# EAGLE board Zeus v1 (EAGLE 7.4.0)
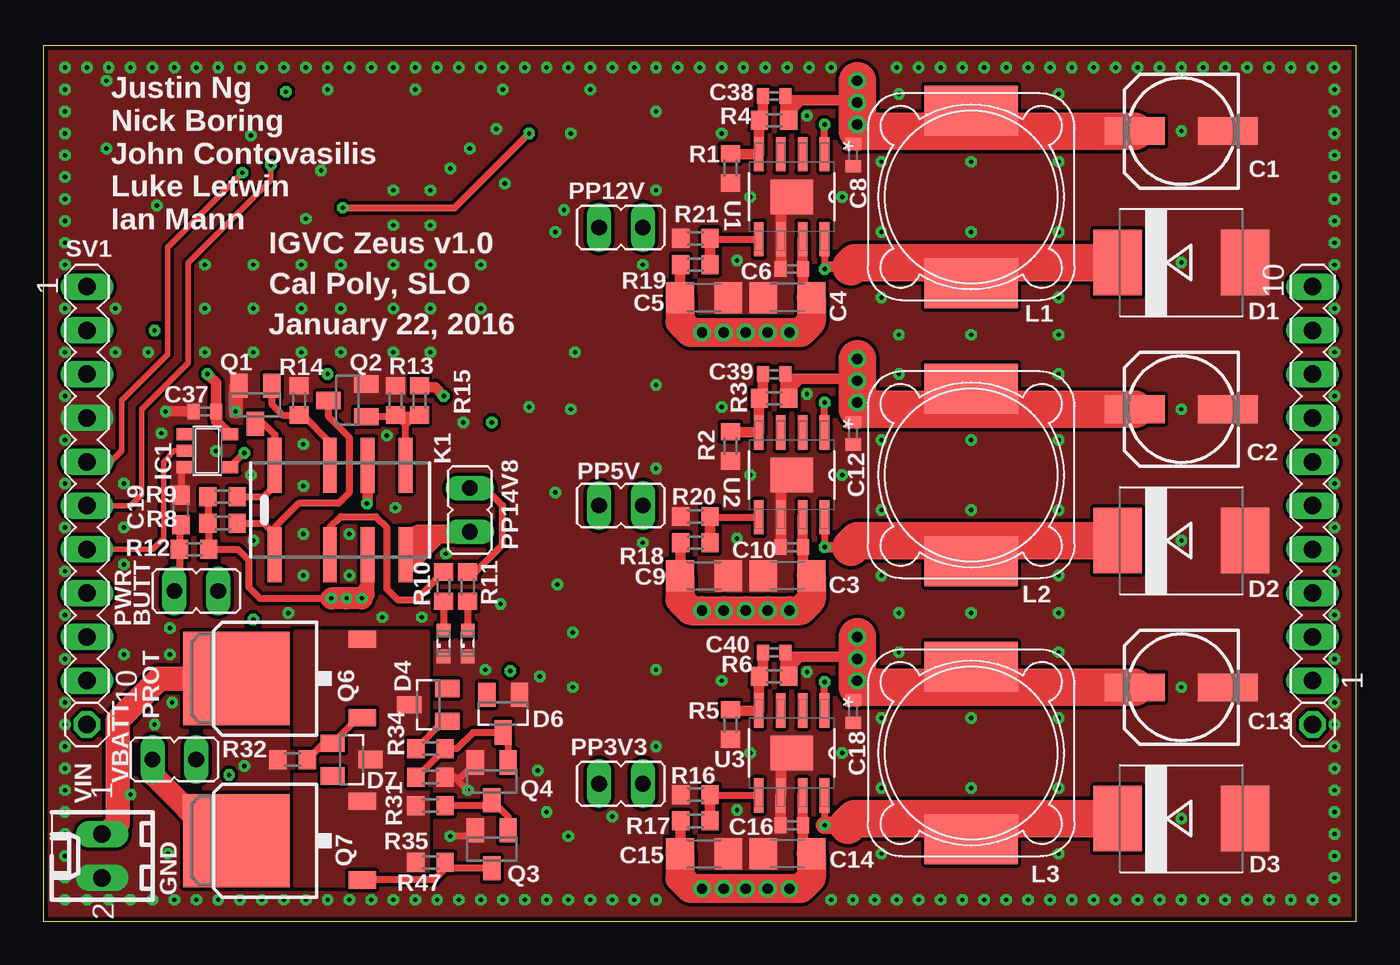
[diagram p0: board, top side]
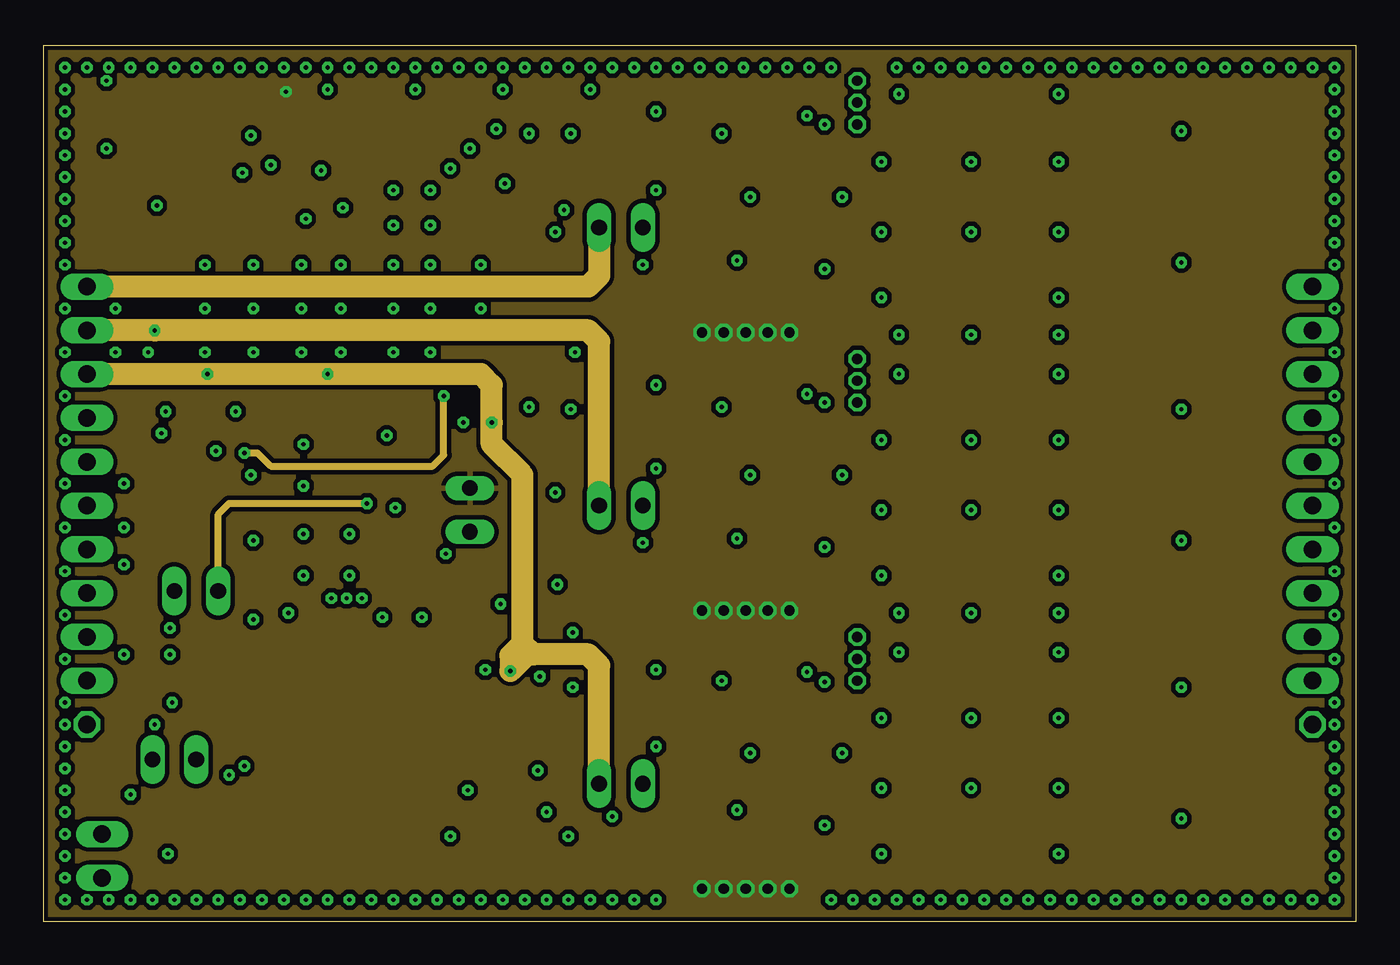
[diagram p1: board, inner layer Route2]
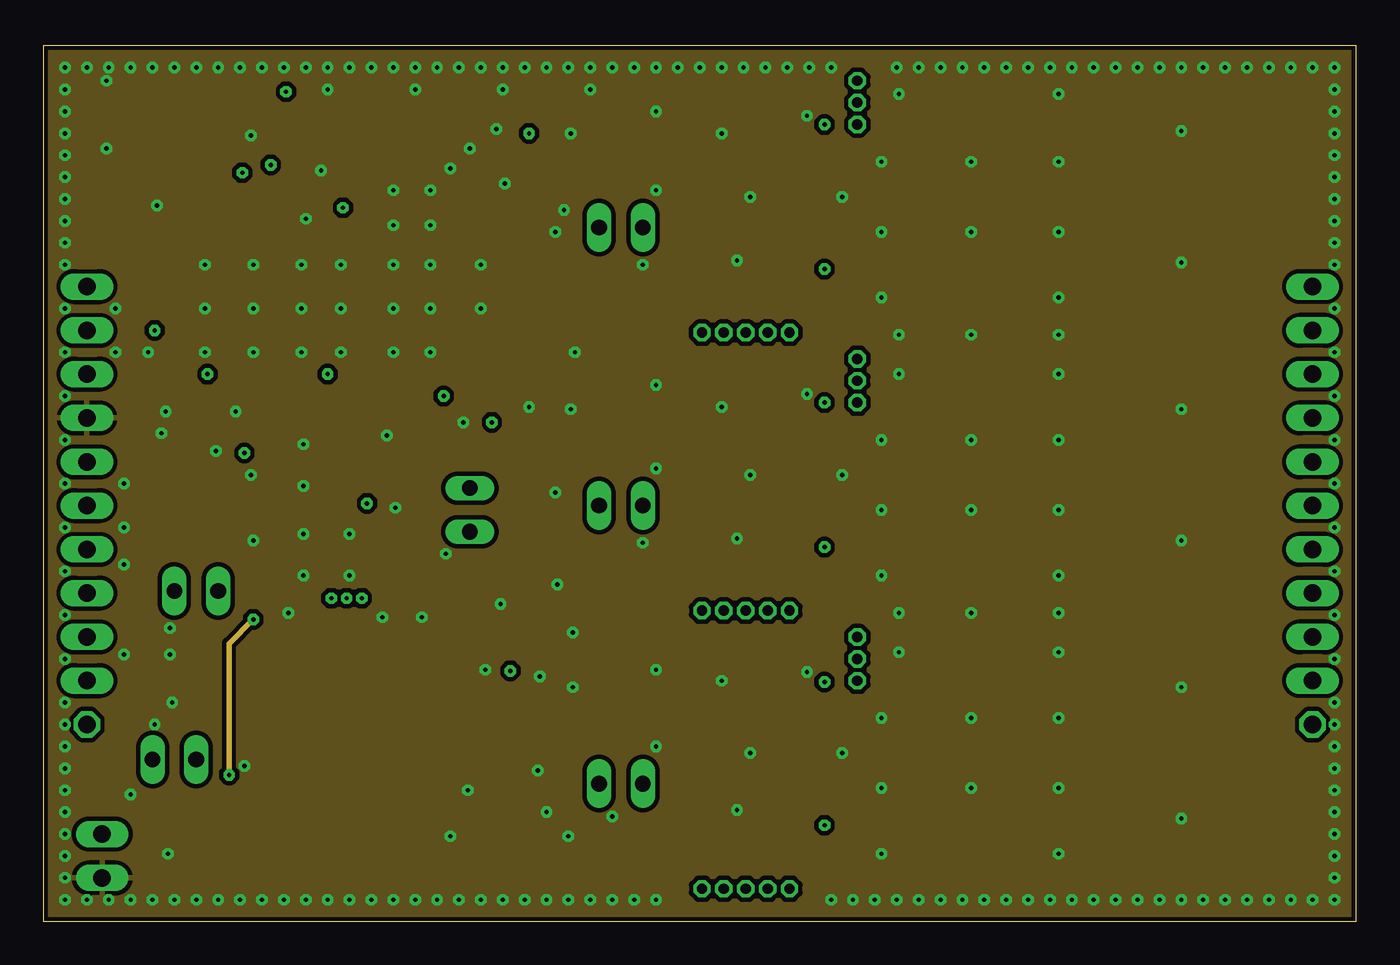
[diagram p2: board, inner layer Route15]
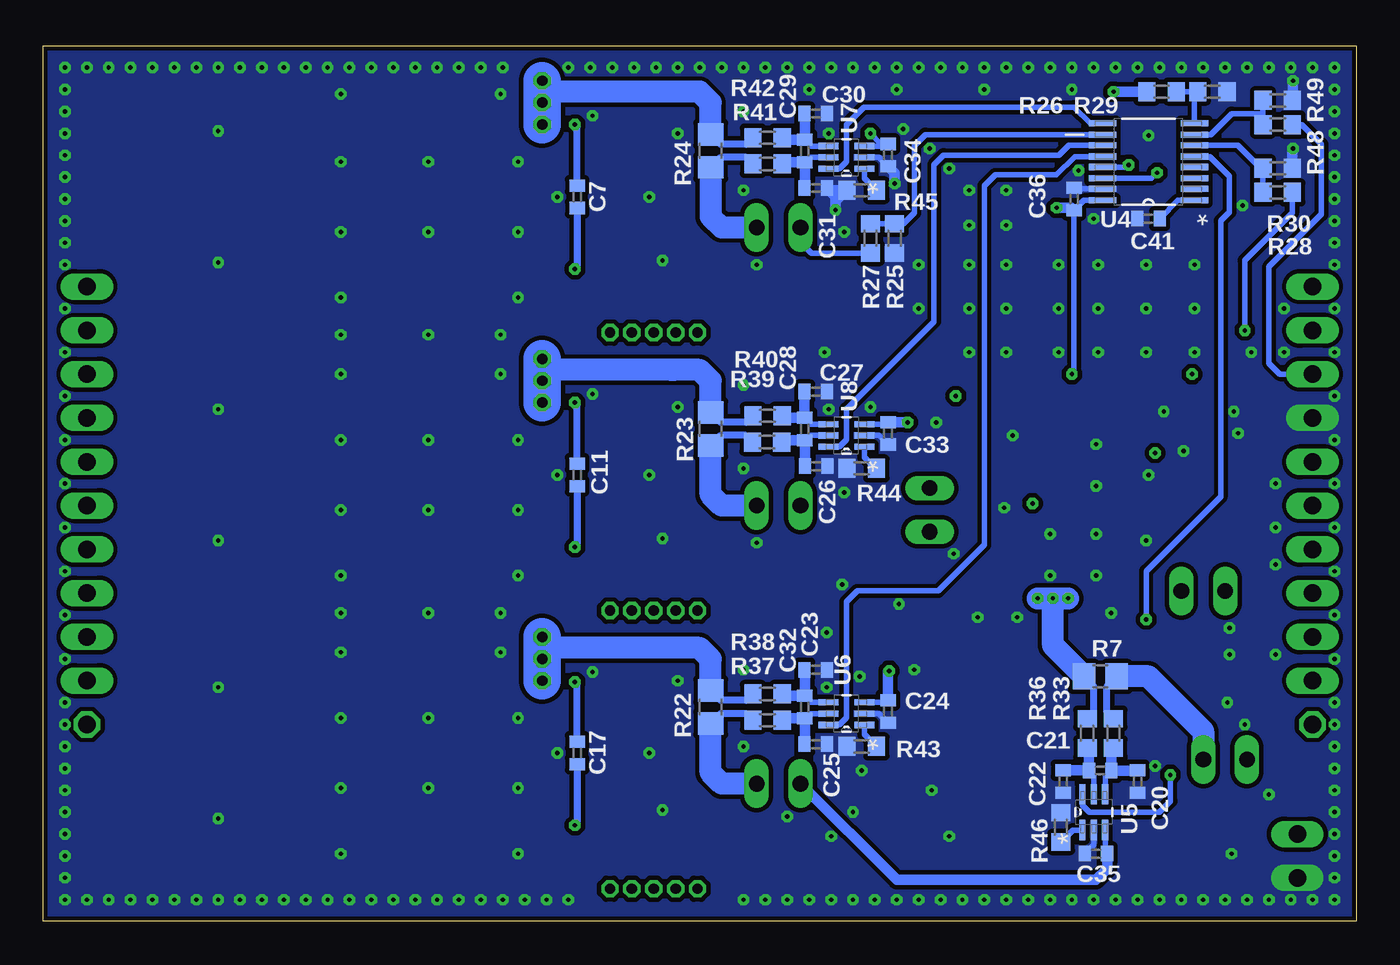
[diagram p3: board, bottom side, seen from below]

Size 76.2 x 50.79 mm. Coordinates in mm from the lower left corner, seen from the top.
Outline: 76.2,50.79 0,50.79 0,0 76.2,0 76.2,50.79
Copper layers ((1+2)*(15+16)): Top 0.035mm / dielectric 10mil / Route2 0.035mm / dielectric 40mil / Route15 0.035mm / dielectric 10mil / Bottom 0.035mm
Design rules "default *": minimum track width 8mil, minimum drill 10mil, track to track 8mil, track to pad 8mil, pad to pad 8mil, via to via 8mil, smd to smd 8mil, copper to edge 10mil, drill to drill 8mil, minimum pad ring 10mil, minimum via ring 8mil, stop-mask expansion 4mil, vias tented up to drill 0mil, thermal gap 10mil

## Footprints (pad centres in the part's own frame; a part is rotated, then mirrored left to right if it is on the bottom)
153CLV-0605 = smd 3.5 x 1.6: + 2.7,0; - -2.7,0
C1206 = smd 1.6 x 1.8: 1 -1.4,0; 2 1.4,0
C0402 = smd 0.7 x 0.9: 1 -0.65,0; 2 0.65,0
C0603 = smd 1.1 x 1: 1 -0.85,0; 2 0.85,0
SMC = smd 2.8 x 3.8: A 3.7,0; C -3.7,0
SOT23 = smd 1 x 1.4: 1 -0.95,-1.1; 2 0.95,-1.1; 3 0,1.1
LED_SML0603 = smd 0.8 x 0.8: A 0.75,0; C -0.75,0
SOT23-5 = smd 0.69 x 0.99: 1 -0.95,-1.29; 2 0,-1.29; 3 0.95,-1.29; 4 0.95,1.3; 5 -0.95,1.3
6410-02 = drill 1.016 long: 1 1.27,0; 2 -1.27,0
JP1 = drill 0.914 long: 1 0,-1.27; 2 0,1.27
1X01 = drill 1.016 octagon: 1 0,0
G6J-2FL-Y = smd 0.8 x 3.2: 1 -3.2,-2.6; 2 0,-2.6; 3 2.2,-2.6; 4 4.4,-2.6; 5 4.4,2.6; 6 2.2,2.6; 7 0,2.6; 8 -3.2,2.6
SUMIDA = smd 5.4 x 2.9: P$1 0,5; P$2 0,-5
D-PAK_TO252AA = smd 1 x 1.6: 1 -2.28,-4.8; 3 2.28,-4.8 | smd 5.4 x 6.2: 4 0,2.5
R0603 = smd 1 x 1.1: 1 -0.85,0; 2 0.85,0
R0805 = smd 1.3 x 1.5: 1 -0.95,0; 2 0.95,0
MA10-1 = drill 1.016 long: 1 -11.43,0; 2 -8.89,0; 3 -6.35,0; 4 -3.81,0; 5 -1.27,0; 6 1.27,0; 7 3.81,0; 8 6.35,0; 9 8.89,0; 10 11.43,0
SOIC127P600X170-9N = smd 1.981 x 0.559: 1 -2.464,1.905; 2 -2.464,0.635; 3 -2.464,-0.635; 4 -2.464,-1.905; 5 2.464,-1.905; 6 2.464,-0.635; 7 2.464,0.635; 8 2.464,1.905 | smd 2.007 x 2.489: 9 0,0
SOP63P600X175-16N = smd 1.6 x 0.356: 1 -2.667,2.235; 2 -2.667,1.575; 3 -2.667,0.965; 4 -2.667,0.305; 5 -2.667,-0.305; 6 -2.667,-0.965; 7 -2.667,-1.575; 8 -2.667,-2.235; 9 2.667,-2.235; 10 2.667,-1.575; 11 2.667,-0.965; 12 2.667,-0.305; 13 2.667,0.305; 14 2.667,0.965; 15 2.667,1.575; 16 2.667,2.235
SOT65P210X110-6N = smd 1.168 x 0.356: 1 -1.041,0.66; 2 -1.041,0; 3 -1.041,-0.66; 4 1.041,-0.66; 5 1.041,0; 6 1.041,0.66

## Placement (x,y rotation side)
C1  330uf  [153CLV-0605]  66.04,45.84 180 top
C2  330uf  [153CLV-0605]  66.04,29.71 180 top
C3  10uf  [C1206]  43.18,20.06 180 top
C4  10uf  [C1206]  43.18,36.19 180 top
C5  10uf  [C1206]  38.35,36.19 0 top
C6  .1uf  [C0402]  43.43,37.84 180 top
C7  10n  [C0402]  45.21,42.03 270 bottom
C8  10n  [C0402]  46.99,44.44 270 top
C9  10uf  [C1206]  38.35,20.06 0 top
C10  .1uf  [C0402]  43.43,21.71 180 top
C11  10n  [C0402]  45.21,25.9 270 bottom
C12  10n  [C0402]  46.99,28.31 270 top
C13  330uf  [153CLV-0605]  66.04,13.58 180 top
C14  10uf  [C1206]  43.18,3.93 180 top
C15  10uf  [C1206]  38.35,3.93 0 top
C16  .1uf  [C0402]  43.43,5.58 180 top
C17  10n  [C0402]  45.21,9.77 270 bottom
C18  10n  [C0402]  46.99,12.18 270 top
C19  1uf  [C0603]  8,23.87 90 top
C20  .1uf  [C0402]  12.7,8.12 270 bottom
C21  .1uf  [C0402]  14.86,8.75 180 bottom
C22  .1uf  [C0402]  17.02,8.12 270 bottom
C23  .1uf  [C0402]  31.37,14.6 0 bottom
C24  .1uf  [C0402]  27.18,12.18 270 bottom
C25  .1uf  [C0402]  31.37,10.28 0 bottom
C26  .1uf  [C0402]  31.34,26.41 0 bottom
C27  .1uf  [C0402]  31.37,30.72 0 bottom
C28  .1uf  [C0402]  32,28.56 90 bottom
C29  .1uf  [C0402]  32,44.69 90 bottom
C30  .1uf  [C0402]  31.37,46.85 0 bottom
C31  .1uf  [C0402]  31.37,42.54 0 bottom
C32  .1uf  [C0402]  32,12.44 90 bottom
C33  .1uf  [C0402]  27.18,28.31 270 bottom
C34  .1uf  [C0402]  27.18,44.44 270 bottom
C35  .1uf  [C0402]  15.11,3.93 180 bottom
C36  .1uf  [C0402]  16.38,41.9 90 bottom
C37  .1uf  [C0402]  9.4,29.58 180 top
C38  1pf  [C0402]  42.42,47.87 180 top
C39  1pf  [C0402]  42.42,31.74 180 top
C40  1pf  [C0402]  42.42,15.61 180 top
C41  10n  [C0402]  12.07,40.76 180 bottom
D1  [SMC]  66.04,38.22 0 top
D2  [SMC]  66.04,22.09 0 top
D3  [SMC]  66.04,5.96 0 top
D4  13V  [SOT23]  22.35,12.56 90 top
D6  13V  [SOT23]  26.7,12.05 180 top
D7  13V  [SOT23]  17.91,9.39 270 top
GREEN  [LED_SML0603]  24.64,16.12 90 top
IC1  NC7S04M5X  [SOT23-5]  9.53,27.29 270 top
J2  22-27-2021-02  [6410-02]  3.43,3.8 90 top
JP1  [JP1]  8.89,19.17 90 top
JP2  [JP1]  24.77,23.87 0 top
JP3  [JP1]  33.53,7.99 90 top
JP4  [JP1]  33.53,24.12 90 top
JP5  [JP1]  33.53,40.25 90 top
JP6  [JP1]  7.62,9.39 270 top
JP7  [1X01]  2.54,11.42 0 top
JP8  [1X01]  73.66,11.42 0 top
K1  G6JU-2FL-Y  [G6J-2FL-Y]  16.64,23.87 0 top
L1  15uh  [SUMIDA]  53.85,42.03 180 top
L2  15uh  [SUMIDA]  53.85,25.9 180 top
L3  15uh  [SUMIDA]  53.85,9.77 180 top
Q1  2N7002K  [SOT23]  12.32,29.96 180 top
Q2  2N7002K  [SOT23]  17.65,30.22 90 top
Q3  2N7002K  [SOT23]  26.04,4.18 180 top
Q4  2N7002K  [SOT23]  26.04,8.12 180 top
Q6  SUD09P10-195-GE3  [D-PAK_TO252AA]  13.72,14.09 90 top
Q7  SUD09P10-195-GE3  [D-PAK_TO252AA]  13.72,4.69 90 top
R1  1.13k  [R0603]  39.88,43.68 270 top
R2  3.2k  [R0603]  39.88,27.55 270 top
R3  10k  [R0603]  42.42,30.34 0 top
R4  10k  [R0603]  42.42,46.47 0 top
R5  5.83k  [R0603]  39.88,11.42 270 top
R6  10k  [R0603]  42.42,14.21 0 top
R7  0.012  [R0805]  14.86,14.21 180 bottom
R8  300  [R0603]  10.41,23.1 180 top
R9  300  [R0603]  10.41,24.63 180 top
R10  1270  [R0603]  23.24,19.42 90 top
R11  1270  [R0603]  24.64,19.42 90 top
R12  20k  [R0603]  8.76,21.58 180 top
R13  1k  [R0603]  20.45,30.22 270 top
R14  1k  [R0603]  14.86,30.22 270 top
R15  1k  [R0603]  21.84,30.22 270 top
R16  10k  [R0603]  37.85,7.36 0 top
R17  20k  [R0603]  37.85,5.83 180 top
R18  20k  [R0603]  37.85,21.96 180 top
R19  20k  [R0603]  37.85,38.09 180 top
R20  10k  [R0603]  37.85,23.48 0 top
R21  10k  [R0603]  37.85,39.61 0 top
R22  0.012  [R0805]  37.47,12.44 270 bottom
R23  0.012  [R0805]  37.47,28.56 270 bottom
R24  0.012  [R0805]  37.47,44.69 270 bottom
R25  10.7k  [R0603]  28.19,39.61 270 bottom
R26  16.9k  [R0603]  11.3,48.12 180 bottom
R27  1.91k  [R0603]  26.8,39.61 90 bottom
R28  1.87k  [R0603]  4.57,42.28 0 bottom
R29  2.37k  [R0603]  8.36,48.12 180 bottom
R30  1.07k  [R0603]  4.57,43.68 180 bottom
R31  100k  [R0603]  22.48,8.37 180 top
R32  10k  [R0603]  14.48,9.39 0 top
R33  10  [R0603]  14.1,10.91 270 bottom
R34  100k  [R0603]  22.48,10.02 180 top
R35  100k  [R0603]  22.48,6.72 180 top
R36  10  [R0603]  15.62,10.91 270 bottom
R37  10  [R0603]  34.16,11.67 0 bottom
R38  10  [R0603]  34.16,13.2 0 bottom
R39  10  [R0603]  34.19,27.8 0 bottom
R40  10  [R0603]  34.16,29.33 0 bottom
R41  10  [R0603]  34.16,43.93 0 bottom
R42  10  [R0603]  34.16,45.46 0 bottom
R43  0  [R0603]  28.7,10.15 0 bottom
R44  0  [R0603]  28.7,26.28 0 bottom
R45  0  [R0603]  28.7,42.41 0 bottom
R46  0  [R0603]  17.15,5.45 270 bottom
R47  100k  [R0603]  22.48,3.42 180 top
R48  16.9k  [R0603]  4.57,46.22 0 bottom
R49  13.7k  [R0603]  4.57,47.62 180 bottom
RED  [LED_SML0603]  23.24,16.12 90 top
SV1  [MA10-1]  2.54,25.39 270 top
SV2  [MA10-1]  73.66,25.39 90 top
U1  TPS5450DDA  [SOIC127P600X170-9N]  43.43,42.03 270 top
U2  TPS5450DDA  [SOIC127P600X170-9N]  43.43,25.9 270 top
U3  TPS5450DDA  [SOIC127P600X170-9N]  43.43,9.77 270 top
U4  MAX11615  [SOP63P600X175-16N]  12.07,44.06 180 bottom
U5  INA199A2DCKR  [SOT65P210X110-6N]  15.24,6.34 90 bottom
U6  INA199A2DCKR  [SOT65P210X110-6N]  29.59,12.05 180 bottom
U7  INA199A2DCKR  [SOT65P210X110-6N]  29.59,44.31 180 bottom
U8  INA199A2DCKR  [SOT65P210X110-6N]  29.59,28.18 180 bottom

## Library data of the parts
C1-C41 R1-R6 R8-R21 R25 R27 R28 R30-R49 = rcl
D1-D4 D6 D7 = diode
GREEN RED = eagle-ltspice; SPICEMODEL: NONE; SPICEPREFIX: D; SPICETYPE: diode
IC1 = 74xx-little-de
J2 = con-molex; OC_FARNELL: unknown; OC_NEWARK: unknown
JP1-JP6 = jumper
JP7 JP8 = pinhead
K1 = relay; MPN: G6JU-2FL-Y DC3; OC_FARNELL: unknown; OC_NEWARK: 04M9916
L1-L3 = CUSTOM
Q1-Q4 = transistor-small-signal
Q6 Q7 = transistor-power
R7 R22-R24 R26 R29 = resistor
SV1 SV2 = con-lstb; OC_FARNELL: unknown; OC_NEWARK: unknown
U1-U3 = Texas Instruments_By_element14_Batch_1; MPN: TPS5450DDA; OC_FARNELL: 1564960; OC_NEWARK: 37M0059; PACKAGE: SOIC-8; SUPPLIER: TEXAS INSTRUMENTS
U4 = Maxim_By_element14_Batch_1; MPN: MAX11602EEE+T; OC_FARNELL: -; OC_NEWARK: 09R0346; PACKAGE: QSOP-16; SUPPLIER: Maxim
U5-U8 = Texas Instruments_By_element14_Batch_1; MPN: INA199A2DCKR; OC_FARNELL: -; OC_NEWARK: 74R6385; PACKAGE: SC70-6; SUPPLIER: Texas Instruments

## Nets
ADC_3V3_I: U4.12 U6.6
ADC_3V3_V: R48.1 R49.2 U4.7
ADC_5V_I: U4.11 U8.6
ADC_5V_V: R28.1 R30.2 U4.6
ADC_12V_I: U4.9 U7.6
ADC_12V_V: R25.1 R27.2 U4.10
ADC_14V8_I: U4.5 U5.6
ADC_14V8_V: R26.1 R29.2 U4.8
ADC_REF: C41.1 U4.1
BUCK_3V3_BOOT: C17.1 U3.1
BUCK_3V3_ENA: R16.2 R17.1 U3.5
BUCK_3V3_L: C13.+ C18.1 C40.1 L3.P$2 R6.2 R22.1 R38.1
BUCK_3V3_PH: C17.2 D3.C L3.P$1 U3.8
BUCK_3V3_VSENSE: C40.2 R5.1 R6.1 U3.4
BUCK_5V_BOOT: C11.1 U2.1
BUCK_5V_ENA: R18.1 R20.2 U2.5
BUCK_5V_L: C2.+ C12.1 C39.1 L2.P$2 R3.2 R23.1 R40.1
BUCK_5V_PH: C11.2 D2.C L2.P$1 U2.8
BUCK_5V_VSENSE: C39.2 R2.1 R3.1 U2.4
BUCK_12V_BOOT: C7.1 U1.1
BUCK_12V_ENA: R19.1 R21.2 U1.5
BUCK_12V_L: C1.+ C8.1 C38.1 L1.P$2 R4.2 R24.1 R42.1
BUCK_12V_PH: C7.2 D1.C L1.P$1 U1.8
BUCK_12V_VSENSE: C38.2 R1.1 R4.1 U1.4
COIL_RESET: K1.8 Q1.3 R9.1
COIL_SET: K1.1 Q2.3 R8.1
CSAMP_3V3_IN+: C23.1 C32.2 R38.2 U6.4
CSAMP_3V3_IN-: C25.1 C32.1 R37.2 U6.5
CSAMP_3V3_REF: R43.2 U6.1
CSAMP_5V_IN+: C27.1 C28.2 R40.2 U8.4
CSAMP_5V_IN-: C26.1 C28.1 R39.2 U8.5
CSAMP_5V_REF: R44.2 U8.1
CSAMP_12V_IN+: C29.2 C30.1 R42.2 U7.4
CSAMP_12V_IN-: C29.1 C31.1 R41.2 U7.5
CSAMP_12V_REF: R45.2 U7.1
GND: C1.- C2.- C3.2 C4.2 C5.2 C6.2 C8.2 C9.2 C10.2 C12.2 C13.- C14.2 C15.2 C16.2 C18.2 C19.2 C20.2 C22.2 C23.2 C24.2 C25.2 C26.2 C27.2 C30.2 C31.2 C33.2 C34.2 C35.2 C36.2 C37.2 C41.2 D1.A D2.A D3.A D6.1 GREEN.C IC1.3 J2.2 Q1.2 Q2.2 Q3.2 Q4.2 R1.2 R2.2 R5.2 R13.1 R14.1 R16.1 R20.1 R21.1 R27.1 R29.1 R30.1 R31.1 R32.1 R43.1 R44.1 R45.1 R46.1 R49.1 RED.C SV1.4 U1.6 U1.9 U2.6 U2.9 U3.6 U3.9 U4.15 U5.2 U6.2 U7.2 U8.2
GREEN_LED: GREEN.A R11.1
I2C_SCL: SV1.6 U4.13
I2C_SDA: SV1.5 U4.14
MCU_DIS_INV: IC1.4 R15.1
MCU_DISABLE: IC1.2 SV1.7
OPAMP_REF1: R46.2 U5.1
OVP_G: Q3.3 Q7.1 R47.1
OVP_INV: Q3.1 Q4.3 R35.1
OVP_TRIG: D4.1 R34.2
OVP_TRIG_R: D6.3 Q4.1 R31.2 R34.1
PP3V3: C24.1 C33.1 C34.1 C35.1 C36.1 C37.1 IC1.5 JP3.2 R48.2 SV1.3 U4.16 U5.3 U6.3 U7.3 U8.3
PP3V3_JUMP: JP3.1 R22.2 R37.1
PP5V: JP4.2 R28.2 SV1.2
PP5V_JUMP: JP4.1 R23.2 R39.1
PP12V: JP5.2 R25.2 SV1.1
PP12V_JUMP: JP5.1 R24.2 R41.1
PP14V8: C3.1 C4.1 C5.1 C6.1 C9.1 C10.1 C14.1 C15.1 C16.1 JP2.2 R11.2 R17.2 R18.2 R19.2 R26.2 U1.7 U2.7 U3.7
RED_LED: R10.1 RED.A
RELAY_FLIP_COM: JP1.1 K1.6
SWITCH_DEB_CAP: C19.1 JP1.2 R12.2
SWITCH_ENGAGE: K1.5 Q2.1 R13.2 R15.2
SWITCH_OFF: K1.2 R10.2
SWITCH_RESET: K1.7 Q1.1 R14.2
VBATT_IN+: C20.1 C21.1 R33.2 U5.4
VBATT_IN-: C21.2 C22.1 R36.2 U5.5
VBATT_OVP: JP6.1 Q7.4
VBATT_PROT_J: JP6.2 R7.1 R33.1
VBATT_RAW: J2.1 Q6.4
VBATT_RELAY: JP2.1 K1.4
VBATT_RVP: D4.3 D7.3 Q6.3 Q7.3 R35.2 R47.2
VBATT_RVP_G: D7.1 Q6.1 R32.2
VBATT_SENSE: K1.3 R7.2 R8.2 R9.2 R12.1 R36.1

## Tracks (layer width: path | path; a pad name or v marks a point on that pad's centre or on a via)
ADC_3V3_I
  Bottom 0.305: U6.6 30,11.39 29.59,11.8 29.59,18.53 28.96,19.17 24.26,19.17 21.59,21.83 21.59,42.66 20.96,43.3 17.4,43.3 16.33,44.36 U4.12
ADC_3V3_V
  Bottom 0.305: R49.2 5.42,46.85 | 5.42,46.85 R48.1 | U4.7 8.46,45.63 7.24,46.85 5.42,46.85
ADC_5V_I
  Bottom 0.305: U8.6 30,27.52 29.59,27.93 29.59,29.71 24.51,34.79 24.51,43.88 23.95,44.44 17.27,44.44 16.69,45.02 U4.11
ADC_5V_V
  Bottom 0.305: R28.1 R30.2 5.55,43.68 6.9,45.02 U4.6
ADC_12V_I
  Bottom 0.305: U7.6 30,43.65 29.59,44.06 29.59,46.22 28.58,47.23 16.38,47.23 15.44,46.29 U4.9 15.06,46.29
ADC_12V_V
  Bottom 0.305: 28.25,40.52 R25.1 R27.2 26.29,40.46 25.65,41.1 25.65,41.61 25.65,41.9 25.65,45 25.02,45.63 U4.10
ADC_14V8_I  (via drill 0.25)
  Route15 0.305: v10.8,8.5 10.8,16.12 v12.19,17.52
  Bottom 0.305: U5.6 15.9,6.75 15.49,6.34 11.43,6.34 10.8,6.98 v10.8,8.5 | U4.5 8.51,44.36 7.37,43.22 7.37,41.14 7.87,40.63 7.87,24.63 12.19,20.31 v12.19,17.52
ADC_14V8_V
  Bottom 0.305: R26.1 R29.2 9.4,47.93 U4.8
ADC_REF
  Bottom 0.305: C41.1 10.35,41.82 U4.1
BUCK_3V3_BOOT  (via drill 0.25)
  Top 0.406: U3.1 v45.34,13.88
  Bottom 0.406: C17.1 45.21,13.76 v45.34,13.88
BUCK_3V3_ENA
  Top 0.406: R16.2 38.75,7.31 U3.5
  Top 0.61: R17.1 R16.2
BUCK_3V3_L  (via drill 0.6)
  Top 0.61: C18.1 47.24,13.09 47.24,13.58 | L3.P$2 53.93,14.85 54.44,14.85 | 43.9,15.36 43.27,14.72 R6.2 43.07,14.41 C40.1 43.32,15.36 47.24,15.36 | 53.8,13.58 54.1,13.58 | v47.24,16.5 v47.24,15.23
  Top 2.184: C13.+ 54.1,13.58 53.98,13.58 | 53.98,13.58 53.34,14.21 | 54.44,15.1 54.44,14.85 54.44,14.21 53.8,13.58 | 53.8,13.58 47.24,13.58 v47.24,13.96 v47.24,15.23 47.24,15.36 v47.24,16.5 | 53.8,13.58 53.98,13.58
  Bottom 0.406: R38.1 35.39,12.82 36.9,12.82 R22.1
  Bottom 1.27: 47.12,15.87 38.1,15.87 37.47,15.23 R22.1
  Bottom 2.184: v47.24,16.5 47.24,15.74 | 47.24,15.74 v47.24,15.23 | v47.24,15.23 v47.24,13.96 | v47.24,15.24 v47.24,15.23 | 47.12,15.87 arc-90 47.24,15.74
BUCK_3V3_PH  (via drill 0.25)
  Top 0.406: U3.8 v45.34,5.58
  Top 0.61: L3.P$1 53.85,4.82 53.34,5.32
  Top 1.016: v45.34,5.58 46.69,5.58
  Top 2.184: D3.C 53.98,5.96 | 53.98,5.96 53.34,5.32 | 46.69,5.58 47.07,5.96 53.98,5.96
  Bottom 0.406: C17.2 45.21,5.71 v45.34,5.58
BUCK_3V3_VSENSE
  Top 0.61: C40.2 41.77,14.41 R6.1 41.53,14.18 U3.4 39.92,12.23 R5.1
BUCK_5V_BOOT  (via drill 0.25)
  Top 0.406: U2.1 v45.34,30.09
  Bottom 0.406: C11.1 45.21,29.96 v45.34,30.09
BUCK_5V_ENA
  Top 0.406: R20.2 38.75,23.43 U2.5
  Top 0.61: R18.1 R20.2
BUCK_5V_L  (via drill 0.6)
  Top 0.61: C12.1 47.24,29.21 47.24,29.71 | 47.75,29.71 48.39,30.34 53.34,30.34 53.34,30.39 L2.P$2 | 43.9,31.49 43.27,30.85 R3.2 43.07,30.54 C39.1 43.32,31.49 47.24,31.49
  Top 2.184: 53.98,29.71 53.34,30.34 | C2.+ 47.75,29.71 47.24,29.71 v47.24,30.09 v47.24,31.36 47.24,31.49 v47.24,32.63
  Bottom 0.406: R40.1 35.39,28.95 36.9,28.95 R23.1
  Bottom 1.27: 47.12,31.99 39.75,31.99 39.62,31.99 38.1,31.99 37.47,31.36 R23.1
  Bottom 2.184: v47.24,32.63 47.24,31.87 | 47.24,31.87 v47.24,30.09 | 47.12,31.99 47.24,31.87
BUCK_5V_PH  (via drill 0.25)
  Top 0.406: U2.8 v45.34,21.71
  Top 0.61: v45.34,21.71 46.86,21.71 | L2.P$1 53.85,20.94 53.34,21.45
  Top 2.184: D2.C 53.98,22.09 | 53.98,22.09 53.34,21.45 | 46.86,21.71 47.24,22.09 53.98,22.09
  Bottom 0.406: C11.2 45.21,21.83 v45.34,21.71
BUCK_5V_VSENSE
  Top 0.61: C39.2 41.77,30.54 R3.1 41.53,30.3 U2.4 39.92,28.36 R2.1
BUCK_12V_BOOT  (via drill 0.25)
  Top 0.406: U1.1 v45.34,46.22
  Bottom 0.406: C7.1 45.21,46.09 v45.34,46.22
BUCK_12V_ENA
  Top 0.406: R21.2 38.75,39.56 U1.5
  Top 0.61: R19.1 R21.2
BUCK_12V_L  (via drill 0.6)
  Top 0.61: C8.1 47.12,45.22 47.12,45.71 47.24,45.84 | 47.63,45.84 48.26,46.47 53.34,46.47 53.34,46.52 L1.P$2 | 43.07,46.67 C38.1 43.32,47.62 | 47.12,47.49 arc90 47.24,47.62 | 47.12,47.49 47.24,47.36 | 47.12,47.49 v47.24,47.49 47.12,47.62 43.32,47.62 | 43.32,47.62 43.18,47.62 43.18,46.47 R4.2 43.27,46.94 43.82,47.49
  Top 2.184: 53.98,45.84 53.34,46.47 | C1.+ 47.63,45.84 47.24,45.84 v47.24,46.22 47.24,47.36 v47.24,47.49 47.24,47.62 v47.24,48.76
  Bottom 0.406: R42.1 35.39,45.08 36.9,45.08 R24.1
  Bottom 1.27: 47.24,48.12 38.1,48.12 37.47,47.49 R24.1
  Bottom 2.184: v47.24,48.76 47.24,48.12 v47.24,46.22
BUCK_12V_PH  (via drill 0.25)
  Top 0.406: U1.8 v45.34,37.84
  Top 0.61: v45.34,37.84 45.47,37.96 46.86,37.96 | L1.P$1 53.85,37.07 53.34,37.58
  Top 2.184: D1.C 53.98,38.22 | 53.98,38.22 53.34,37.58 | 46.86,37.96 47.12,38.22 53.98,38.22
  Bottom 0.406: C7.2 45.21,37.96 v45.34,37.84
BUCK_12V_VSENSE
  Top 0.61: C38.2 41.77,46.67 R4.1 41.53,46.43 U1.4 39.92,44.49 R1.1
COIL_RESET
  Top 0.406: R9.1 12.8,24.63 13.44,25.26 K1.8 13.44,28.23 12.8,28.86 Q1.3
COIL_SET
  Top 0.406: R8.1 12.8,23.1 13.44,22.47 K1.1 13.44,22.85 14.83,24.25 17.15,24.25 17.78,24.88 17.78,28.06 16.55,29.28 Q2.3
CSAMP_3V3_IN+
  Bottom 0.305: C32.2 31.63,12.71 U6.4
  Bottom 0.61: C23.1 32,14.58 C32.2 33.2,13.09 R38.2
CSAMP_3V3_IN-
  Bottom 0.305: C32.1 31.74,12.05 U6.5
  Bottom 0.61: C25.1 32,10.29 C32.1 33.2,11.79 R37.2
CSAMP_3V3_REF
  Bottom 0.305: R43.2 28.55,10.85 U6.1
CSAMP_5V_IN+
  Bottom 0.305: C28.2 31.63,28.84 U8.4
  Bottom 0.61: C27.1 32.02,29.23 C28.2 33.2,29.21 R40.2
CSAMP_5V_IN-
  Bottom 0.305: 31.99,27.9 31.71,28.18 U8.5
  Bottom 0.61: C26.1 31.99,27.9 C28.1 33.23,27.91 R39.2
CSAMP_5V_REF
  Bottom 0.305: U8.1 28.55,26.91 27.92,26.28 R44.2
CSAMP_12V_IN+
  Bottom 0.305: U7.4 30.64,44.96 31.62,44.96 C29.2
  Bottom 0.61: 32.02,45.36 C29.2 | R42.2 33.2,45.34 C29.2 | C30.1 32,46.84 C29.2
CSAMP_12V_IN-
  Bottom 0.305: U7.5 31.74,44.31 C29.1
  Bottom 0.61: C31.1 32,42.55 C29.1 33.2,44.04 R41.2
CSAMP_12V_REF
  Bottom 0.305: R45.2 28.55,43.11 U7.1
GND  (via drill 0.25)
  Top 0.406: Q3.2 24.75,4.94 v23.62,4.94 | Q4.2 24.24,8.37 | R31.1 23.88,8.37 v24.64,7.61 | IC1.3 8,26.11 C19.2
  Top 0.61: C16.2 42.78,7.29 U3.6 42.8,9.13 U3.9 | C10.2 42.8,21.72 U2.6 42.8,25.26 U2.9 | C6.2 42.8,37.85 U1.6 42.8,41.39 U1.9 | C37.2 v7.11,29.58 | 11.3,31.13 Q1.2
  Top 0.813: 11.3,31.13 11.18,31 v11.18,29.58
  Bottom 0.305: U8.2 27.7,28.18 C33.2 | U7.2 27.7,44.31 C34.2 | 30.59,42.41 C31.2 | R45.1 29.97,42.41 | U6.2 27.7,12.05 C24.2 | U5.2 15.24,4.45 C35.2 | U4.15 16.33,42.48 16.38,42.54
  Bottom 0.61: R49.1 3.68,47.65 v3.68,48.76 | R30.1 3.72,44.78 v3.68,44.82 | C31.2 30.23,42.04 v30.23,41.27 30.23,41.77 29.59,42.41 R45.1 30.61,42.41 | C34.2 26.8,43.41 v26.8,42.79
  other vias: 15.11,27.68 15.11,25.26 15.11,22.47 15.11,20.06 17.78,22.47 17.78,20.06 12.19,22.09 23.37,21.33 6.48,11.42 44.32,30.6 44.32,46.73 44.32,14.47 10.03,27.29 16.13,43.55 24.77,44.82 23.62,43.68 26.29,45.96 19.69,17.64 1.27,33.01 1.27,30.47 1.27,27.93 1.27,25.39 1.27,35.55 1.27,38.09 1.27,39.36 1.27,40.63 1.27,41.9 1.27,43.17 1.27,44.44 1.27,45.71 1.27,46.98 1.27,48.25 1.27,49.52 2.54,49.52 3.81,49.52 5.08,49.52 6.35,49.52 7.62,49.52 8.89,49.52 10.16,49.52 11.43,49.52 12.7,49.52 13.97,49.52 15.24,49.52 16.51,49.52 17.78,49.52 19.05,49.52 20.32,49.52 21.59,49.52 22.86,49.52 24.13,49.52 25.4,49.52 26.67,49.52 27.94,49.52 29.21,49.52 30.48,49.52 31.75,49.52 33.02,49.52 34.29,49.52 35.56,49.52 36.83,49.52 38.1,49.52 39.37,49.52 40.64,49.52 41.91,49.52 43.18,49.52 44.45,49.52 45.72,49.52 49.53,49.52 50.8,49.52 52.07,49.52 53.34,49.52 54.61,49.52 55.88,49.52 57.15,49.52 58.42,49.52 59.69,49.52 60.96,49.52 62.23,49.52 63.5,49.52 64.77,49.52 66.04,49.52 67.31,49.52 68.58,49.52 69.85,49.52 71.12,49.52 72.39,49.52 73.66,49.52 74.93,49.52 74.93,48.25 74.93,46.98 74.93,45.71 74.93,44.44 74.93,43.17 74.93,41.9 74.93,40.63 74.93,39.36 74.93,38.09 74.93,35.55 74.93,33.01 74.93,30.47 74.93,27.93 74.93,25.39 74.93,22.85 74.93,20.31 74.93,17.77 74.93,15.23 74.93,12.69 74.93,11.42 74.93,10.15 74.93,8.88 74.93,7.61 74.93,6.34 74.93,5.07 74.93,3.8 74.93,2.53 74.93,1.26 73.66,1.26 72.39,1.26 71.12,1.26 69.85,1.26 68.58,1.26 67.31,1.26 66.04,1.26 64.77,1.26 63.5,1.26 62.23,1.26 60.96,1.26 59.69,1.26 58.42,1.26 57.15,1.26 55.88,1.26 54.61,1.26 53.34,1.26 52.07,1.26 50.8,1.26 49.53,1.26 48.26,1.26 46.99,1.26 45.72,1.26 35.56,1.26 34.29,1.26 31.75,1.26 33.02,1.26 30.48,1.26 29.21,1.26 27.94,1.26 5.08,1.26 3.81,1.26 2.54,1.26 1.27,1.26 1.27,2.53 1.27,3.8 1.27,11.42 1.27,12.69 1.27,15.23 1.27,17.77 1.27,20.31 1.27,22.85 1.27,10.15 1.27,8.88 1.27,7.61 1.27,6.34 1.27,5.07 6.35,1.26 7.62,1.26 8.89,1.26 10.16,1.26 11.43,1.26 12.7,1.26 13.97,1.26 15.24,1.26 16.51,1.26 17.78,1.26 19.05,1.26 20.32,1.26 21.59,1.26 22.86,1.26 24.13,1.26 25.4,1.26 26.67,1.26 5.08,7.36 7.37,15.48 21.97,17.64 7.37,17.01 4.7,15.48 4.7,20.69 4.7,22.85 4.7,25.39 6.6,41.52 12.07,45.58 15.24,40.76 16.51,48.25 21.59,48.25 26.67,48.25 31.75,48.25 39.37,45.71 35.56,46.98 39.37,29.83 35.56,31.1 35.56,14.6 39.37,13.96 53.85,27.93 53.85,23.87 48.64,27.93 48.64,23.87 58.93,23.87 58.93,27.93 53.85,40 58.93,40 48.64,40 53.85,44.06 58.93,44.06 48.64,44.06 53.85,11.8 58.93,11.8 48.64,11.8 48.64,7.74 53.85,7.74 58.93,7.74 49.66,15.61 58.93,15.61 49.66,31.74 49.66,48 58.93,48 58.93,31.74 48.64,20.06 58.93,20.06 48.64,3.93 58.93,3.93 48.64,36.19 58.93,36.19 66.04,45.84 66.04,38.22 66.04,29.71 66.04,22.09 66.04,13.58 66.04,5.96 46.36,25.9 41.02,25.9 46.36,9.77 41.02,9.77 46.36,42.03 41.02,42.03 53.85,17.9 53.85,34.03 58.93,34.03 49.66,34.03 49.66,17.9 58.93,17.9 9.4,35.55 9.4,33.01 12.19,35.55 12.19,33.01 14.99,35.55 14.99,33.01 9.4,38.09 12.19,38.09 14.99,38.09 17.27,38.09 17.27,35.55 17.27,33.01 20.32,38.09 20.32,35.55 20.32,33.01 22.48,38.09 22.48,35.55 22.48,33.01 25.4,38.09 25.4,35.55 20.32,42.41 20.32,40.38 22.48,40.38 22.48,42.41 30.86,33.01 24.38,28.95 20.45,23.99 19.94,28.18 14.22,17.9 12.07,25.9 6.86,28.31 6.1,33.01 4.19,33.01 4.19,35.55 35.56,42.41 35.56,26.28 35.56,10.15 40.26,6.47 40.26,22.21 40.26,38.34 28.7,8.75 29.72,24.88 29.72,40 34.8,38.09 34.8,21.96 33.02,6.09 7.49,12.69 11.68,9.01 25.65,14.6 7.24,3.93 28.19,29.83 30.61,29.71 30.61,45.71 30.73,13.58 26.54,18.4 29.85,19.55 28.83,14.21 30.73,16.75 29.21,6.34 30.48,4.94
  pour Top (isolate 0.203, rank 6, no thermals): 76.2,0.12 76.2,50.79 0,50.79 0,-0.01 29.21,-0.01
  pour Bottom (isolate 0.254, no thermals): 76.2,-0.01 0,-0.01 0,50.79 76.2,50.79
  pour Route15 (isolate 0.254): 76.2,-0.01 0,-0.01 0,50.79 76.2,50.79
GREEN_LED
  Top 0.406: R11.1 GREEN.A
I2C_SCL  (via drill 0.25)
  Top 0.305: SV1.6 5.08,24.12 5.72,24.75 5.72,29.71 8.41,32.4 8.41,38.19 13.21,42.99 v13.21,43.88
  Bottom 0.305: U4.13 13.34,43.75 v13.21,43.88
I2C_SDA  (via drill 0.25)
  Top 0.305: SV1.5 3.94,26.66 4.57,27.29 4.57,30.22 7.24,32.88 7.24,39.11 v11.56,43.42
  Bottom 0.305: U4.14 11.89,43.09 v11.56,43.42
MCU_DIS_INV  (via drill 0.25)
  Top 0.406: 10.89,26.28 IC1.4 11.65,27.17 v11.68,27.17 | 21.93,30.98 R15.1
  Top 0.61: 21.93,30.98 22.73,30.98 v23.24,30.47
  Route2 0.406: v23.24,30.47 23.24,27.04 22.61,26.41 13.21,26.41 12.45,27.17 v11.68,27.17
MCU_DISABLE
  Top 0.305: SV1.7 6.35,21.58 6.99,22.21 6.99,26.66 7.62,27.29 IC1.2
OPAMP_REF1
  Bottom 0.305: U5.1 16.45,5.3 R46.2
OVP_G
  Top 0.406: Q7.1 22.69,2.41 23.33,3.04 R47.1 23.67,3.08 Q3.3
OVP_INV
  Top 0.406: Q3.1 26.99,6.07 Q4.3 25.74,6.72 R35.1
OVP_TRIG
  Top 0.406: D4.1 23.22,11.61 R34.2
OVP_TRIG_R
  Top 0.406: R31.2 21.68,8.37 R34.1 24,10.02 24.94,10.96 D6.3 26.99,10.67 Q4.1
PP3V3  (via drill 0.25)
  Top 0.406: v17.4,41.39 23.88,41.39 v28.19,45.71
  Top 0.61: IC1.5 10.05,29.02 C37.1 10.05,31.23 v9.54,31.74
  Route2 1.27: SV1.3 v9.54,31.74 v16.51,31.74 25.4,31.74 26.04,31.1 v26.04,28.95 26.04,27.68 27.81,25.9 27.81,16.12 | JP3.2 32.26,14.85 31.62,15.48 28.07,15.48 v27.11,14.53 27.11,15.42 27.81,16.12 | 28.45,15.48 27.81,16.12
  Bottom 0.305: U8.3 27.3,28.84 C33.1 | R48.2 3.18,46.22 2.03,45.08 2.03,41.01 5.08,37.96 5.08,32.38 4.45,31.74 SV1.3 | v16.51,31.74 16.38,31.87 C36.1 15.81,41.82 U4.16 | v28.19,45.71 27.57,45.09 C34.1 | U7.3 27.3,44.97 | U6.3 27.3,12.71 | U5.3 14.58,4.04
  Bottom 0.406: 27.3,44.97 C34.1 | 14.58,4.04 C35.1 | 27.3,12.71 C24.1
  Bottom 0.61: v17.4,41.39 16.53,41.39 C36.1 | C33.1 v26.05,28.96 v26.04,28.95 | JP3.2 26.67,2.4 15.11,2.4 14.46,3.05 C35.1 | C24.1 27.18,14.47 v27.11,14.53
PP3V3_JUMP
  Bottom 0.406: R37.1 35.39,12.05 36.9,12.05 R22.2
  Bottom 1.27: JP3.1 36.83,7.99 37.47,8.63 R22.2
PP5V  (via drill 0.25)
  Route2 1.27: JP4.2 32.26,33.65 31.62,34.28 v6.48,34.28 SV1.2
  Bottom 0.305: R28.2 3.72,41.1 6.48,38.34 v6.48,34.28
PP5V_JUMP
  Bottom 0.406: R39.1 35.42,28.18 36.9,28.18 R23.2
  Bottom 1.27: JP4.1 36.83,24.12 37.47,24.75 R23.2
PP12V
  Route2 1.27: JP5.2 32.26,37.46 31.62,36.82 SV1.1
  Bottom 0.305: R25.2 31.62,38.76 32.26,39.4 JP5.2
PP12V_JUMP
  Bottom 0.406: R41.1 35.39,44.31 36.9,44.31 R24.2
  Bottom 1.27: R24.2 37.47,40.88 36.83,40.25 JP5.1
PP14V8  (via drill 0.25, 0.6)
  Top 0.305: R19.2 36.95,38.05
  Top 0.406: U2.7 44.08,23.42 | R11.2 25.11,20.27 26.67,21.83 26.67,24.12 25.65,25.14 JP2.2
  Top 0.61: U1.7 C6.1 44.08,36.68 arc90 C4.1 | U2.7 44.07,21.72 C10.1 44.08,20.55 C3.1 | U3.7 44.07,5.59 C16.1 44.08,4.42 C14.1 | R17.2 37,3.97 C15.1 | R18.2 37,20.1 C9.1 | 36.95,38.05 C5.1 | v43.31,18.02 v40.77,18.02
  Top 1.676: C4.1 44.58,34.79 43.95,34.15 v43.31,34.15 v42.04,34.15 v40.77,34.15 v39.5,34.15 v38.23,34.15 37.59,34.15 36.95,34.79 C5.1 | C3.1 44.58,18.66 43.95,18.02 v43.31,18.02 v42.04,18.02 v40.77,18.02 v39.5,18.02 v38.23,18.02 37.59,18.02 36.95,18.66 C9.1 | C14.1 44.58,2.53 43.95,1.9 v43.31,1.9 v42.04,1.9 v40.77,1.9 v39.5,1.9 v38.23,1.9 37.59,1.9 36.95,2.53 C15.1
  Bottom 0.61: v14.1,48.12 R26.2
  pour Route2 (isolate 0.254): 76.2,50.79 76.2,-0.01 0,-0.01 0,50.79
RED_LED
  Top 0.406: R10.1 RED.A
RELAY_FLIP_COM  (via drill 0.25)
  Top 0.61: K1.6 18.84,24.29 v18.8,24.25
  Route2 0.406: JP1.1 10.16,23.61 10.8,24.25 v18.8,24.25
SWITCH_DEB_CAP
  Top 0.406: C19.1 7.91,22.93 R12.2 7.91,19.46 JP1.2
SWITCH_ENGAGE
  Top 0.406: R15.2 21.21,29.37 | 21.21,29.37 21.08,29.37 | 21.08,29.37 R13.2 | R13.2 20.35,29.27 Q2.1 | 21.04,28.78 R13.2 | 21.04,29.32 21.08,29.37 | K1.5 21.04,28.77 | 21.04,28.77 21.04,29.19 21.21,29.37 | 21.04,28.77 21.59,29.33
SWITCH_OFF
  Top 0.406: K1.2 16.64,22.85 17.27,23.48 19.3,23.48 19.94,22.85 19.94,19.29 20.57,18.66 21.63,18.66 R10.2
SWITCH_RESET
  Top 0.406: K1.7 16.64,27.8 15.07,29.37 R14.2 13.9,29.37 13.27,30 Q1.1
VBATT_IN+
  Bottom 0.305: U5.4 14.58,8.38 C21.1
  Bottom 0.61: R33.2 14.21,9.95 C21.1 12.72,8.75 C20.1
VBATT_IN-
  Bottom 0.305: U5.5 15.24,8.48 C21.2
  Bottom 0.61: R36.2 15.51,9.95 C21.2 15.52,8.77 C22.1
VBATT_OVP
  Top 1.27: JP6.1 6.35,8.5 10.16,4.69
  Top 1.778: 9.91,4.69 10.16,4.69 Q7.4
VBATT_PROT_J
  Bottom 0.406: R33.1 14.48,12.14 14.48,13.64 R7.1
  Bottom 1.27: R7.1 12.07,14.21 8.89,11.04 JP6.2
VBATT_RAW
  Top 1.422: J2.1 3.68,5.07 4.32,5.71 4.32,11.67 6.73,14.09 Q6.4
VBATT_RELAY
  Top 0.813: 22.37,22.6 K1.4 21.04,21.96 21.67,22.6 JP2.1 | 21.08,20.44 22.99,22.34 24.51,22.34 JP2.1 | 24.64,22.6 JP2.1
VBATT_RVP
  pour Top (no thermals): 22.23,2.15 14.73,2.15 14.73,16.75 22.23,16.75
VBATT_RVP_G
  Top 0.406: Q6.1 18.28,11.81 D7.1 16.28,10.34 R32.2
VBATT_SENSE  (via drill 0.25)
  Top 0.406: R9.2 R8.2 9.61,23.05 R12.1 11.3,21.58 11.94,20.94 11.94,19.38 12.57,18.74 v16.72,18.74 | 18.16,19.04 18.84,19.72 K1.3 18.84,19.04 17.91,19.04 v17.61,18.74
  Top 0.813: 18.84,18.95 K1.3
  Top 1.27: v18.5,18.74 v17.61,18.74 v16.72,18.74
  Bottom 0.406: R36.1 15.24,12.14 15.24,13.64 R7.2
  Bottom 1.27: v18.5,18.74 v17.61,18.74 | v17.61,18.74 v16.72,18.74 | R7.2 17.61,16.01 v17.61,18.74

## Text on the board
tPlace: PP12V | Justin Ng / Nick Boring / John Contovasilis / Luke Letwin / Ian Mann | IGVC Zeus v1.0 / Cal Poly, SLO / January 22, 2016 | PP14V8 | PP5V | PWR / BUTT | PROT | VBATT | PP3V3 | VIN | GND